# Altium PCB Whey_AGR_AGR_PCB.PcbDoc
Units mm, origin at the board's own origin, x right, y up, seen from the top; angles counter-clockwise.
Board outline 70.25 x 50.25 mm, 2 copper layers (Top Layer, Bottom Layer); 69 components, 42 nets, 191 pads, 53 vias.
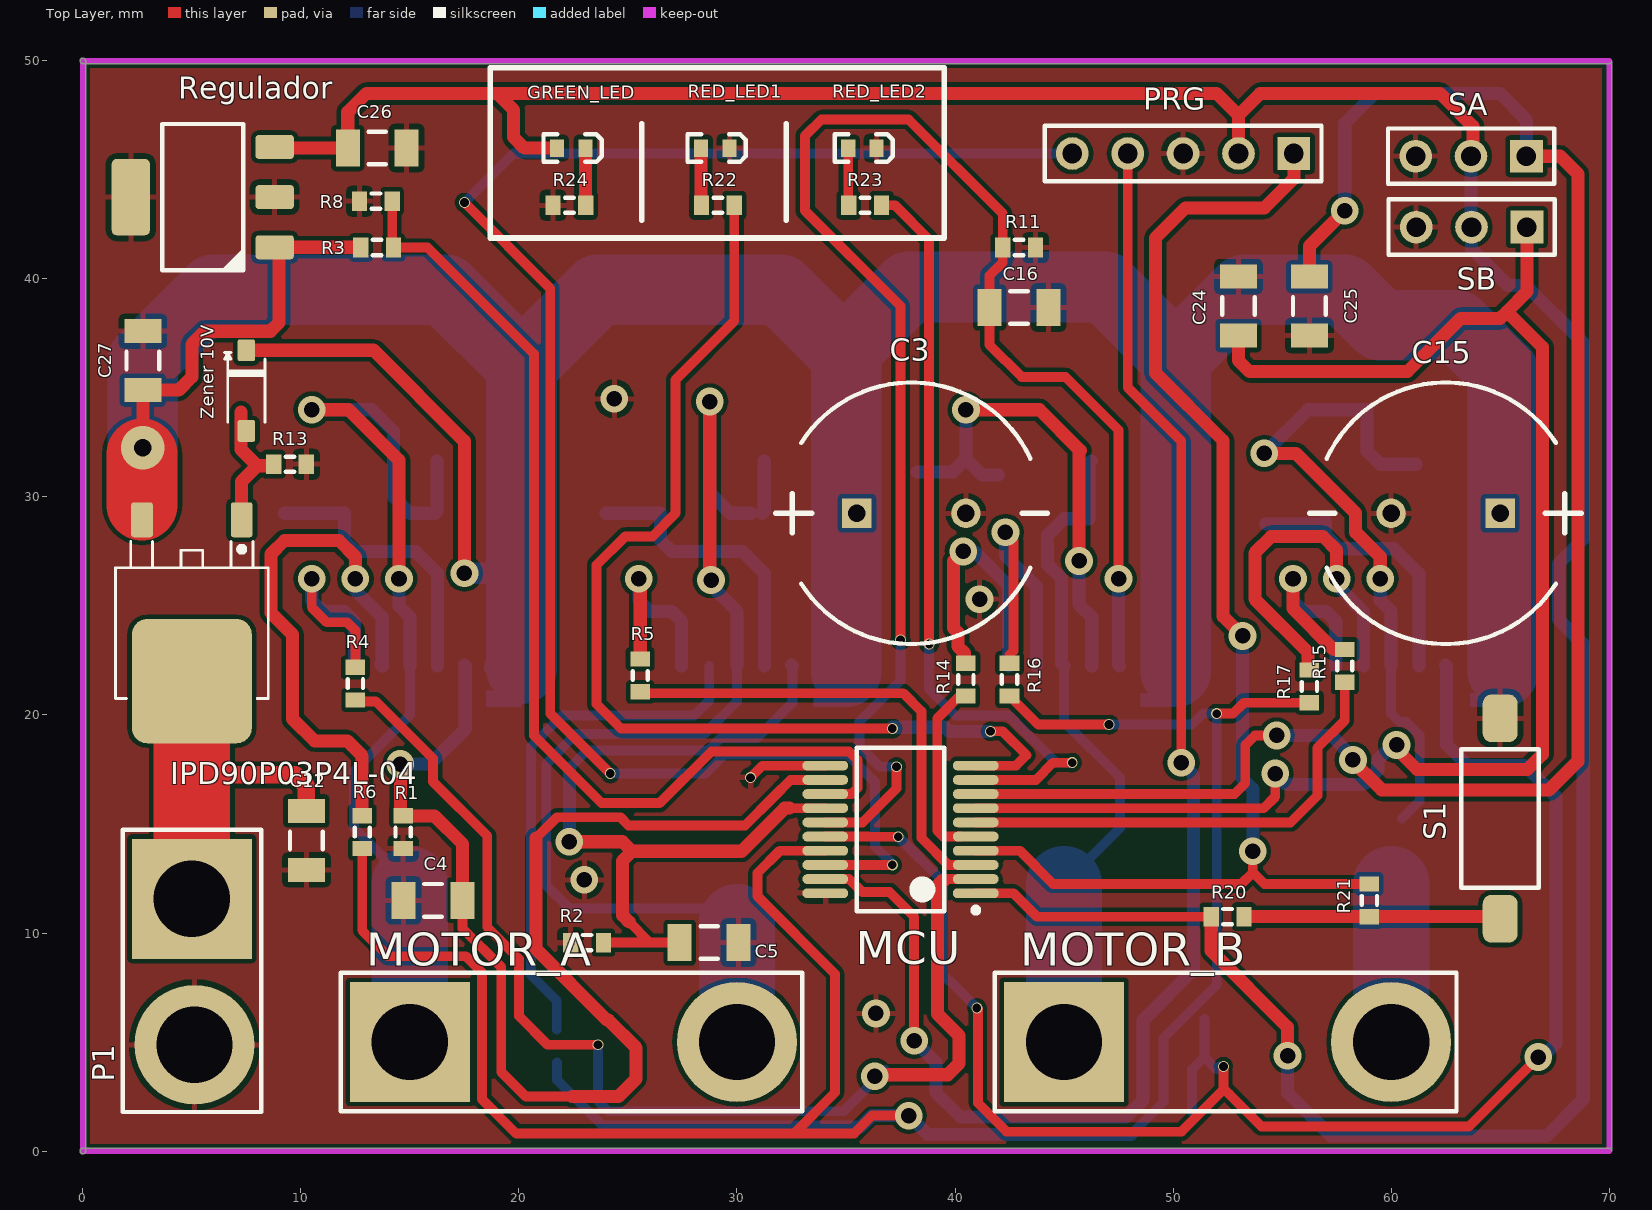
[diagram p0: Top Layer view]
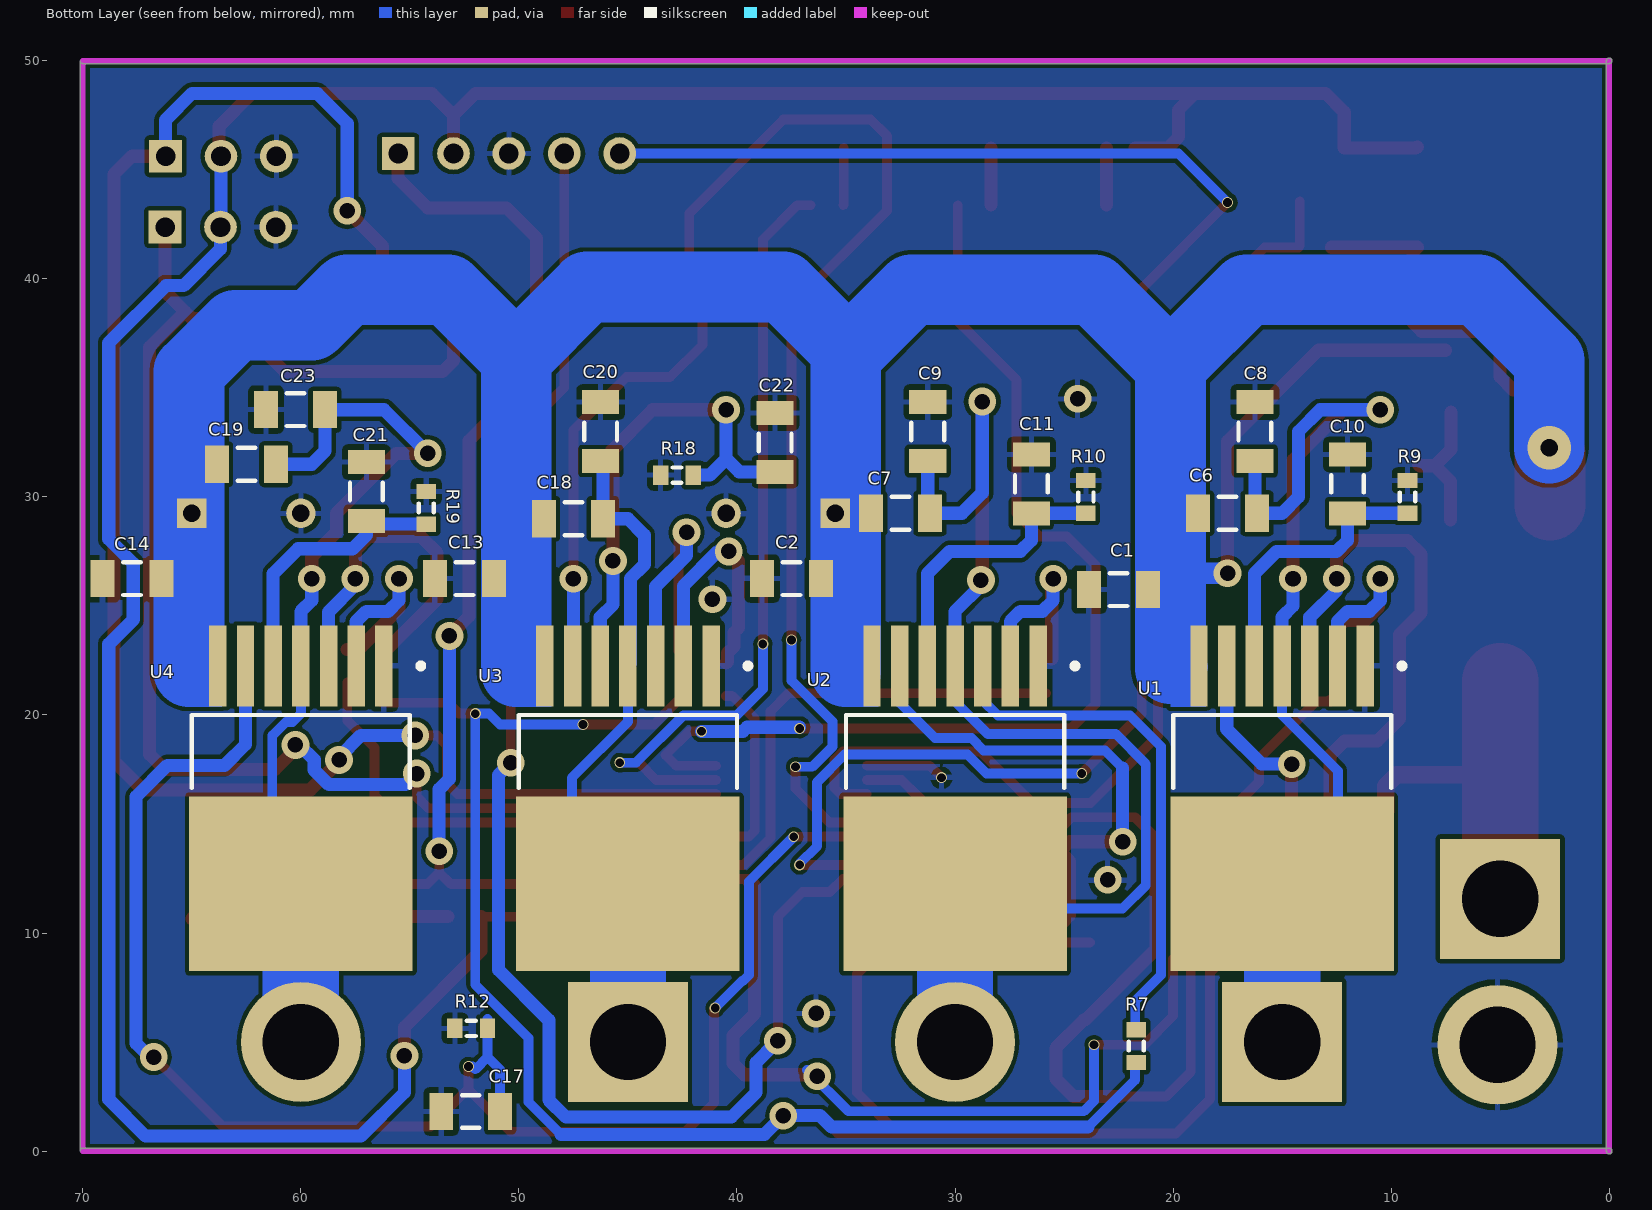
[diagram p1: Bottom Layer view, seen from below]

## Layer stack, top to bottom
Top Solder: solder mask 0.0102, Solder Resist, Dk 3.5
Top Layer: signal copper 0.0356
Dielectric 1: dielectric 0.32, FR-4, Dk 4.8
Bottom Layer: signal copper 0.0356
Bottom Solder: solder mask 0.0102, Solder Resist, Dk 3.5

## Board outline
-0.127,0 cw(c0,0) 0,0.127 70,0.127 cw(c70,0) 70.127,0 70.127,50 cw(c70,50) 70,49.873 0,49.873 cw(c0,50) -0.127,50 cw(c0,50) 0,50.127 cw(c0,50) 0.127,50 0.127,0 cw(c0,0) 0,-0.127 cw(c0,0)

## Design rules (kind name [scope] priority, off if disabled: settings)
Clearance [All] p1: gap=0.2 ignorepadtopadclearanceinfootprint=FALSE
PolygonConnect [All] p1: connectstyle=Relief reliefconductorwidth=0.254 reliefentries=4 polygonreliefangle="90 Angle" airgapwidth=0.254
RoutingVias [All] p1: holewidth=0.711 width=1.27 viastyle="Through Hole" minholewidth=0.711 minwidth=1.27 maxholewidth=0.8 maxwidth=2
SolderMaskExpansion [All] p1: expansion=0.102
Width [All] p1: maxlimit=3.5 minlimit=0.3 preferedwidth=0.6
30 further rules are at their usual default settings.

## Components (designator, comment, footprint, x,y, rotation, side; value= is the part's Value field where it differs from the comment)
C1 "Cap Semi" C1206 22.5,25.75 r180 bottom value=100nF
C2 "Cap Semi" C1206 37.5,26.25 r180 bottom value=100nF
C3 "1000uF" CAPR5-4X5 38,29.25 r0 top
C4 "Cap Semi" C1206 16.063,11.5 r0 top value=1nF
C5 "Cap Semi" C1206 28.725,9.563 r180 top value=1nF
C6 "Cap Semi" C1206 17.5,29.25 r0 bottom value=220nF
C7 "Cap Semi" C1206 32.5,29.25 r0 bottom value=220nF
C8 "Cap Semi" C1206 16.25,33 r270 bottom value=220nF
C9 "Cap Semi" C1206 31.25,33 r270 bottom value=220nF
C10 "Cap Semi" C1206 12,30.6 r270 bottom value=100nF
C11 "Cap Semi" C1206 26.5,30.6 r270 bottom value=100nF
C12 "Cap Semi" C1206 10.25,14.25 r90 top value=100nF
C13 "Cap Semi" C1206 52.5,26.25 r180 bottom value=100nF
C14 "Cap Semi" C1206 67.75,26.25 r180 bottom value=100nF
C15 "Cap2" CAPR5-4X5 62.5,29.25 r180 top value=1000uF
C16 "Cap Semi" C1206 42.938,38.687 r180 top value=1nF
C17 "Cap Semi" C1206 52.212,1.813 r180 bottom value=1nF
C18 "Cap Semi" C1206 47.5,29 r0 bottom value=220nF
C19 "Cap Semi" C1206 62.5,31.5 r0 bottom value=220nF
C20 "Cap Semi" C1206 46.25,33 r270 bottom value=220nF
C21 "Cap Semi" C1206 60.25,34 r180 bottom value=220nF
C22 "Cap Semi" C1206 38.25,32.5 r270 bottom value=100nF
C23 "Cap Semi" C1206 57,30.25 r270 bottom value=100nF
C24 "Cap Semi" C1206 53,38.75 r270 top value=100nF
C25 "Cap Semi" C1206 56.25,38.75 r270 top value=100nF
C26 "" C1206 13.5,46 r0 top value=0.1uF
C27 "Cap Semi" C1206 2.75,36.25 r270 top value=220nF
GREEN_LED "POWER_ON" 3.2X1.6X1.1 22.4,46 r0 top
IPD90P03P4L-04 "IPD50P04P4" TO-252 5,25.25 r180 top
MCU "PIC16F1829T-I/SS" MCHP-SSOP-SS20_N 37.5,14.75 r180 top
MOTOR_A "Header 2" HDR1X2#1 19.318,5 r0 top
MOTOR_B "Header 2" HDR1X2#1 49.318,5 r0 top
P1 "Header 2" HDR1X2#2 5,7.25 r270 top
PRG "Header 5" HDR1X5 55.54,45.75 r180 top
R1 "Res3" J1-0603 14.687,14.625 r90 top value=1K
R2 "Res3" J1-0603 23.125,9.563 r0 top value=1K
R3 "Res3" J1-0603 13.5,41.437 r180 top value=20K
R4 "Res3" J1-0603 12.5,21.438 r90 top value=10K
R5 "Res3" J1-0603 25.562,21.812 r90 top value=10K
R6 "Res3" J1-0603 12.812,14.625 r90 top value=10K
R7 "Res3" J1-0603 21.688,4.812 r90 bottom value=10K
R8 "Res3" J1-0603 13.437,43.563 r0 top value=5K1
R9 "Res3" J1-0603 9.25,30 r270 bottom value=510R
R10 "Res3" J1-0603 24,30 r270 bottom value=510R
R11 "Res3" J1-0603 42.938,41.437 r180 top value=1K
R12 "Res3" J1-0603 52.188,5.625 r180 bottom value=1K
R13 "Res3" J1-0603 9.5,31.5 r180 top value=10K
R14 "Res3" J1-0603 40.5,21.625 r90 top value=10K
R15 "Res3" J1-0603 57.875,22.25 r90 top value=10K
R16 "Res3" J1-0603 42.5,21.625 r90 top value=10K
R17 "Res3" J1-0603 56.25,21.312 r90 top value=10K
R18 "Res3" J1-0603 42.75,31 r180 bottom value=510R
R19 "Res3" J1-0603 54.25,29.5 r270 bottom value=510R
R20 "Res3" J1-0603 52.5,10.75 r0 top value=10K
R21 "Res3" J1-0603 59,11.5 r90 top value=10K
R22 "Res3" J1-0603 29.125,43.375 r0 top value=300R
R23 "Res3" J1-0603 35.875,43.375 r0 top value=300R
R24 "Res3" J1-0603 22.313,43.375 r0 top value=300R
RED_LED1 "CALIBRATION" 3.2X1.6X1.1 29,46 r0 top
RED_LED2 "ERROR" 3.2X1.6X1.1 35.75,46 r0 top
Regulador "LM7805" SOT223 5.5,43.75 r180 top
S1 "FSMSMTR" "TE FSMSMTR" 65,15.25 r0 top
SA "Pin head" HDR1X3 66.205,45.625 r180 top
SB "Pin head" HDR1X3 66.228,42.375 r180 top
U1 "BTN8982TA" TO127P1500X440-8N-1 15,17.25 r270 bottom
U2 "BTN8982TA" TO127P1500X440-8N-1 29.997,17.25 r270 bottom
U3 "BTN8982TA" TO127P1500X440-8N-1 45,17.25 r270 bottom
U4 "BTN8982TA" TO127P1500X440-8N-1 60,17.25 r270 bottom
"Zener 10V" "BZT52HC10WF-7" SOD123 7.5,34.875 r270 top

## Footprints (in the part's own frame and the unit in brackets; to place one, negate y for a bottom-side part, rotate by r counter-clockwise, add the part's x,y. Pads: shape width x height; smd on the part's side, far side on the other; paste and mask are expansions set on the pad)
3.2X1.6X1.1 [mm] "SMT LED; 2 Flat Leads"
  rect 0.65x0.8 smd: 1(-0.65,0) 2(0.65,0)
  silkscreen extent -1.27,-0.64 1.4,0.64, body extent -0.8,-0.39 0.8,0.39, height 0.7
C1206 [mm] "Chip Capacitor, Body 3.2x1.6mm, IPC High Density"
  rect 1.1x1.7 smd: 1(-1.35,0) 2(1.35,0)
  silkscreen extent -0.4,-0.75 0.4,0.75, body extent -1.7,-0.9 1.7,0.9, height 1.3
CAPR5-4X5 [mm] "Capacitor; 2 Leads"
  rect 1.35x1.35 hole 0.8: 1(-2.5,0)
  round 1.35 hole 0.8: 2(2.5,0)
  silkscreen extent -6.22,-6 6.22,6, body extent -6.35,-6.35 6.35,6.35, height 20.32
HDR1X2#1 [mm] "Connector; Header; 2 Position"
  rect 5.5x5.5 hole 3.5: 1(-4.318,0)
  round 5.5 hole 3.5: 2(10.682,0)
  silkscreen extent -7.49,-3.17 13.68,3.17
HDR1X2#2 [mm] "Connector; Header; 2 Position"
  rect 5.5x5.5 hole 3.5: 1(-4.318,0)
  round 5.5 hole 3.5: 2(2.375,0.125)
  silkscreen extent -7.49,-3.18 5.46,3.18
HDR1X3 [mm] "Connector; Header; 3 Position"
  rect 1.5x1.5 hole 0.9: 1(0,0)
  round 1.5 hole 0.9: 2(2.54,0) 3(5.08,0)
  silkscreen extent -1.27,-1.27 6.35,1.27, body extent -1.27,-1.27 6.35,1.27, height 9.5
HDR1X5 [mm] "Connector; Header; 5 Position"
  rect 1.5x1.5 hole 0.9: 1(0,0)
  round 1.5 hole 0.9: 2(2.54,0) 3(5.08,0) 4(7.62,0) 5(10.16,0)
  silkscreen extent -1.27,-1.27 11.43,1.27, body extent -1.27,-1.27 11.43,1.27, height 9.5
J1-0603 [mm] "Chip Resistor, Body 1.6x0.8mm, IPC High Density"
  rect 0.7x0.9 smd: 1(-0.75,0) 2(0.75,0)
  silkscreen extent -0.2,-0.35 0.2,0.35, body extent -0.85,-0.48 0.85,0.48, height 0.9
MCHP-SSOP-SS20_N [mm] "SOP, 20-Leads, Body 7.2x5.3mm, Pitch 0.65mm, IPC Medium Density"
  oval 2.1x0.45 smd: 1(-3.45,2.925) 2(-3.45,2.275) 3(-3.45,1.625) 4(-3.45,0.975) 5(-3.45,0.325) 6(-3.45,-0.325) 7(-3.45,-0.975) 8(-3.45,-1.625) 9(-3.45,-2.275) 10(-3.45,-2.925) 11(3.45,-2.925) 12(3.45,-2.275) 13(3.45,-1.625) 14(3.45,-0.975) 15(3.45,-0.325) 16(3.45,0.325) 17(3.45,0.975) 18(3.45,1.625) 19(3.45,2.275) 20(3.45,2.925)
  silkscreen extent -3.58,-3.75 2,3.82, body extent -2.8,-3.75 2.8,3.75, height 2
SOD123 [mm] "SOD-123; 2 Leads; Body 2.7 x 1.6 mm, (LxW)"
  round 0.508 on Mech15: 0(0,0)
  rrect25% 1x0.8 smd: A(1.85,0) K(-1.85,0)
  silkscreen extent -1.75,-1 1.45,0.85, body extent -1.95,-0.9 1.95,0.9, height 1.18
SOT223 [mm] "SOT223 /SC-73"
  round 1 on Mech15: 0(0,0)
  rrect25% 1.75x1.1 smd: 1(-3.3,2.3) 2(-3.3,0) 3(-3.3,-2.3)
  rrect25% 1.75x3.5 smd: 4(3.3,0)
  silkscreen extent -1.85,-3.35 1.85,3.35, body extent -3.65,-3.35 3.65,3.35, height 1.8
"TE FSMSMTR" [mm]
  rrect50% 1.6x2.19 smd: 1(0,4.595) 2(0,-4.595)
  silkscreen extent -1.78,-3.17 1.78,3.17, body extent -1.75,-4.98 1.75,4.98, height 4.42
TO127P1500X440-8N-1 [mm] "TO,1.27mm pitch;7 pin,15.00mm L X 9.25mm W X 4.40mm H body"
  rect 3.7x0.8 smd paste+0 mask+0: 1(-5,3.81) 2(-5,2.54) 3(-5,1.27) 4(-5,0) 5(-5,-1.27) 6(-5,-2.54) 7(-5,-3.81)
  rect 8x10.25 smd paste+0 mask+0: 8(5,0)
  silkscreen extent -5.12,-5 0.6,5.62, body extent -6.4,-5 8.55,5, height 4.51
TO-252 [mm] "D-PAK/TO-252-AA; 3 Leads (1 Cropped); Body 10.3 (inc. leads) x 6.7 mm (LxW max)"
  round 0.5 on Mech15: 0(0,0)
  rrect25% 1x1.6 smd: 1(-2.285,-3.7) 3(2.285,-3.7)
  rrect25% 5.5x5.7 smd: 4(0,3.7)
  silkscreen extent -3.5,-2.7 3.5,4.5, body extent -3.3,-3.95 3.3,5.76, height 2.31

## Part data
C1 C2 C4 C5 C6 C7 C8 C9 C10 C11 C12 C13 C14 C16 C17 C18 C19 C20 C21 C22 C23 C24 C25 C27: "Capacitor (Semiconductor SIM Model)", LatestRevisionDate=29-May-2009, LatestRevisionNote="IPC-7351 Footprint Added.", PackageDescription="Chip Capacitor", PackageReference=C1206, Published=8-Jun-2000, Publisher="Altium Limited"
C3: library part Cap2, "Capacitor", PackageDescription="Capacitor; 2 Leads", PackageReference=CAPR5-4X5, Published=23-Sep-2002, Publisher="Altium Limited"
C15: "Capacitor", PackageDescription="Capacitor; 2 Leads", PackageReference=CAPR5-4X5, Published=23-Sep-2002, Publisher="Altium Limited"
C26: library part "Cap Semi", "Capacitor (Semiconductor SIM Model)", LatestRevisionDate=29-May-2009, LatestRevisionNote="IPC-7351 Footprint Added.", PackageDescription="Chip Capacitor", PackageReference=C1206, Published=8-Jun-2000, Publisher="Altium Limited"
GREEN_LED RED_LED1 RED_LED2: library part LED2, "Typical RED, GREEN, YELLOW, AMBER GaAs LED", LatestRevisionDate=17-Jul-2002, LatestRevisionNote="Re-released for DXP Platform.", PackageDescription="SM LED; 2 Flat Leads", PackageReference=3.2X1.6X1.1, PackageVersion=Feb-2002, Published=8-Jun-2000, Publisher="Altium Limited"
IPD90P03P4L-04: "MOSFET P-Ch -40V -50A DPAK-2 OptiMOS-P2"
MCU: "Flash Microcontroller with XLP Technology, 32 MHz, 17 I/O, -40 to 85 degC, 20-pin SSOP (SS20), Tape and Reel", Manufacturer=Microchip, Operation Voltage Range="1.8V - 5.5V", Supplier Part Number 1=PIC16F1829T-I/SS-ND, # of A/D Channels=12, ComponentLink1Description=Datasheet, ComponentLink1URL=http://ww1.microchip.com/downloads/en/DeviceDoc/41440C.pdf, ComponentLink2Description="Package Specification", ComponentLink2URL=http://www.microchip.com/stellent/groups/techpub_sg/documents/packagingspec/en012702.pdf, ComponentLink3Description="URL Link1", ComponentLink3URL="Product URL:http://www.microchip.com/datasheet/PIC16F1829", DatasheetVersion="Rev. C", Digital Communication="1 -A/E/USART, 2 -MSSP(SPI/I2C)", EEPROM Data Memory (bytes)=256, I/O Pins=17, Internal Oscillator="32 MHz, 31 kHz", Max. CPU Speed MHz=32, Memory Type=Flash, Mounting Technology="Surface Mount", PackageDescription="20-Lead Plastic Shrink Small Outline, 5.3 x 7.2 mm Body, 0.65 mm Pitch", PackageReference=SSOP-SS20, PackageVersion="C04-072B, 12/2012", Packing=T/R, PartNumber=PIC16F1829T-I/SS, Program Memory KBytes=14, Program Memory KWords=8, RAM=1024, RoHS=TRUE, Supplier 1=Digi-Key, Supplier 2=Newark, Supplier 3=Mouser, Supplier Part Number 2=82R4387, Supplier Part Number 3=579-PIC16F1829T-I/SS, Timers="4 - 8-bit, 1 - 16-bit"
MOTOR_A MOTOR_B P1: "Header, 2-Pin", LatestRevisionDate=17-Jul-2002, LatestRevisionNote="Re-released for DXP Platform.", Publisher="Altium Limited"
PRG: "Header, 5-Pin", LatestRevisionDate=17-Jul-2002, LatestRevisionNote="Re-released for DXP Platform.", Publisher="Altium Limited"
R1 R2 R4 R5 R6 R7 R11 R12 R13 R14 R15 R16 R17 R20 R21: "Resistor", LatestRevisionDate=29-May-2009, LatestRevisionNote="IPC-7351 Footprint Added.", PackageDescription="Chip Resistor", PackageReference=J1-0603, Published=8-Jun-2000, Publisher="Altium Limited"
R3 R8 R9 R10 R18 R19 R22 R23 R24: "Resistor_SMD", LatestRevisionDate=29-May-2009, LatestRevisionNote="IPC-7351 Footprint Added.", PackageDescription="Chip Resistor", PackageReference=J1-0603, Published=8-Jun-2000, Publisher="Altium Limited"
Regulador: library part LM7805MP/NOPB, "5V Regulator, 3-Pin SOT-223, Extended Temperature, Tape and Reel", Supplier Part Number 1=MCP1824ST-1202E/DBTR-ND, ComponentLink1Description=Datasheet, ComponentLink1URL=http://ww1.microchip.com/downloads/en/DeviceDoc/22070a.pdf, ComponentLink2Description="Packaging Specification", ComponentLink2URL=http://www.microchip.com/stellent/groups/techpub_sg/documents/packagingspec/en012702.pdf, ComponentLink3Description="Microchip.com Home", ComponentLink3URL=http://www.microchip.com/, DatasheetVersion="revA, Aug-2007", PackageDescription="3-Lead Plastic Small Outline Transistor (DB) [SOT-223]", PackageReference=SOT-223-DB3, PackageVersion="revBB, Aug-2009", Published=29-Jan-2009, Publisher="Altium Limited", Supplier 1=Digi-Key, Supplier 2=Digi-Key, Supplier 3=Digi-Key, Supplier 4=Farnell, Supplier Part Number 2=MCP1824ST-1202E/DBCT-ND, Supplier Part Number 3=MCP1824ST-1202E/DBDKR-ND, Supplier Part Number 4=1675417
S1: "SWITCH TACTILE SPST-NO 0.05A 24V", Contact Rating @ Voltage="0.05A @ 24VDC", Illumination Type, Colour=-, Manufacturer="TE Connectivity Alcoswitch Switches", Operating Force=180gf, Operating Temperature="-35C ~ 85C", Supplier Part Number 1=450-1758-2-ND, Actuator Orientation="Top Actuated", Actuator Type=Standard, Circuit=SPST-NO, ComponentLink1Description=Datasheet, ComponentLink1URL=http://www.te.com/commerce/DocumentDelivery/DDEController?Action=srchrtrv&DocNm=1437566-3&DocType=Customer+Drawing&DocLang=English, ComponentLink2Description="Digi-Key Listing", ComponentLink2URL=http://www.digikey.com/product-detail/en/FSMSMTR/450-1758-2-ND/529671, Illumination=Non-Illuminated, Illumination Voltage=-, Mechanical Life="20,000 Cycles", PartId=8251, Part Number=FSMSMTR, Price=0.175, Supplier 1=Digi-Key, Switch Function=Off-Mom, Switch Travel=0.25mm
SA SB: library part "Header 3", "Header, 3-Pin", LatestRevisionDate=17-Jul-2002, LatestRevisionNote="Re-released for DXP Platform.", Publisher="Altium Limited"
U1 U2 U3 U4: "High Current PN Half Bridge NovalithIC", Manufacturer="Infineon Technologies", ManufacturerPartNumber=BTN8982TA, PackageReference=PG-TO263-7-1
"Zener 10V": "Diode Zener 10.6V 375 mW AEC-Q101"

## Via types
v1: diameter 1.27, hole 0.711, Top Layer to Bottom Layer, 36 vias
v2: diameter 0.5, hole 0.4, Top Layer to Bottom Layer, 16 vias
v3: diameter 2, hole 0.8, Top Layer to Bottom Layer, 1 vias

## Nets (pads, with @x,y where several pads share a name; then routed paths per layer and width w, separated by ;. In a path a pad name is that pad's centre, name@x,y a point inside that pad or via, vN(x,y) a via of type N, cw(c..) or ccw(c..) an arc to the next point about the centre after c; other vN are vias at no path point)
5V: C26.1 GREEN_LED.1 MCU.1 PRG.2 R20.1 Regulador.3 SA.2 SB.2 | length 148.7
  Top Layer w0.45: MCU.1 42.675,11.825 43.75,10.75 R20.1
  Top Layer w0.6: Regulador.3 8.85,46 C26.1 12.15,47.65 13,48.5 19,48.5 ; GREEN_LED.1 20.25,46 19.75,46.5 19.75,47.75 19,48.5 ; R20.1 51.75,9.188 55.25,5.687 v1(55.25,4.375) ; PRG.2 53,47.5 ; SA.2 63.75,45.71 63.75,47 62.25,48.5 54,48.5 53,47.5 ; 19,48.5 52,48.5 53,47.5
  Bottom Layer w0.6: v1(55.25,4.375) 55.25,2.687 57.25,0.687 67.125,0.687 68.812,2.375 68.812,23.25 67.687,24.375 67.687,26.945 68.812,28.07 68.812,37.063 66.188,39.688 65.375,39.688 63.688,41.375 SB.2 63.665,42.397 SA.2
CHANEL_A: C25.1 MCU.8 SA.1 | length 80.6
  Top Layer w0.45: MCU.8 52.813,16.375 53.312,16.875 53.312,18.625 53.75,19.062 v1(54.75,19.062)
  Top Layer w0.6: C25.1 56.25,41.5 v1(57.875,43.125) ; v1(58.249,17.937) 58.249,18.25 58.062,18.063 59.562,16.562 67.25,16.562 68.562,17.875 68.562,44.813 67.75,45.625 SA.1
  Bottom Layer w0.6: v1(54.75,19.062) 57.25,19.062 58.249,18.063 v1(58.249,17.937) ; v1(57.875,43.125) 57.875,47.125 59.25,48.5 65,48.5 66.205,47.295 SA.1
CHANEL_B: C24.2 MCU.7 SB.1 | length 69.7
  Top Layer w0.45: MCU.7 54.163,15.725 54.688,16.25 v1(54.688,17.313)
  Top Layer w0.6: C24.2 53,36.25 53.5,35.75 60.75,35.75 63.187,38.188 65,38.188 65.313,38.5 ; v1(60.25,18.625) 60.063,18.625 61.188,17.5 66.25,17.5 66.938,18.187 66.938,36.875 65.313,38.5 ; SB.1 66.228,39.415 65.313,38.5
  Bottom Layer w0.6: v1(54.688,17.313) 55.198,16.802 58.719,16.802 59.385,17.468 59.385,17.948 60.062,18.625 v1(60.25,18.625)
GND: C1.1 C2.1 C3.2 C4.1 C5.1 C8.1 C9.1 C10.1 C11.1 C12.1 C13.1 C14.1 C15.2 C16.1 C17.1 C20.1 C21.1 C22.1 C23.1 C24.1 C25.2 C26.2 C27.1 MCU.11 MCU.20 P1.2 PRG.3 R1.1 R2.1 R8.1 R9.1 R10.1 R11.1 R12.1 R13.1 R18.1 R19.1 R24.1 RED_LED1.2 RED_LED2.2 Regulador.2 Regulador.4 S1.1 SA.3 SB.3 U1.1 U2.1 U3.1 U4.1 | length 3.7
  Top Layer w0.45: v2(30.625,17.125) 31.175,17.675 MCU.11
  other v1: 36.375,6.312 23,12.438 41.125,25.312 24.375,34.5
INH: MCU.17 R6.1 R7.1 R16.1 R17.1 | length 118.2
  Top Layer w0.45: R6.1@12.812,13.75 12.812,10.125 14,8.938 17.562,8.938 18.313,8.187 18.313,2.375 19.875,0.813 32.625,0.813 ; MCU.17 31.963,13.775 30.937,12.75 30.937,11.688 34.5,8.125 34.5,2.688 32.625,0.813 ; v1(37.875,1.625) 36.187,1.625 35.375,0.813 32.625,0.813 ; R16.1 43.813,19.562 v2(47.062,19.562) ; v2(52,20.062) 52.75,20.062 53.25,20.563 R17.1
  Bottom Layer w0.45: R7.1@21.75,4.062 21.75,3.25 23.9,1.1 ; v2(47.062,19.562) 50.875,19.562 51.375,20.062 v2(52,20.062) 52,7.625 49.562,5.187 49.562,2.25 48.075,0.763
  Bottom Layer w0.6: 23.9,1.1 35.663,1.1 36.187,1.625 v1(37.875,1.625) 38.737,0.763 48.075,0.763
IS_1A: C4.2 MCU.12 R1.2 U1.6 | length 58.1
  Top Layer w0.45: C4.2@17.413,11.063 17.413,10.213 19.188,8.438 19.188,3.625 20.313,2.5 22.438,2.5 ; 20.788,14.35 21.748,15.31 24.653,15.31 25.025,14.938 30.374,14.938 31.685,16.248 32.462,17.025 MCU.12
  Top Layer w0.6: v1(14.563,17.75) 14.563,15.5 R1.2 16.125,15.375 17.413,14.088 C4.2 C4.2@17.413,11.063 ; 20.788,14.35 20.788,9.255 24.033,6.01 24.095,6.01 25.375,4.73 25.375,3.313 24.562,2.5 22.438,2.5
  Bottom Layer w0.6: v1(14.563,17.75) 15.937,17.75 17.54,19.352 U1.6 U1.6@17.5,22.29
IS_1B: C5.2 MCU.14 R2.2 U2.6 | length 37.7
  Top Layer w0.45: R2.2@23.813,9.563 C5.2 ; 25.063,10.5 25.969,9.594 ; 32.413,15.725 MCU.14
  Top Layer w0.6: v1(22.312,14.187) 24.75,14.187 25.188,13.75 ; 25.063,10.5 24.75,10.813 24.75,13.312 25.188,13.75 ; 32.413,15.725 32.187,15.725 30.212,13.75 25.188,13.75
  Bottom Layer w0.45: 22.312,17.562 23.125,18.375 28.688,18.375 29.25,18.938 30.915,18.938 32.54,20.563 U2.6@32.54,22.25
  Bottom Layer w0.6: v1(22.312,14.187) 22.312,17.562 ; U2.6@32.5,22.29 U2.6@32.54,22.25
IS_2A: C16.2 MCU.15 R11.2 U3.6 | length 73.4
  Top Layer w0.45: MCU.15 35.763,15.075 37.313,16.625 v2(37.313,17.625) ; v2(37.5,23.437) 37.5,38.75 33.125,43.125 33.125,46.563 33.875,47.313 37.875,47.313 42.188,43 R11.2 42.188,40.75 41.588,40.15 C16.2 41.588,36.975 43.063,35.5 45.063,35.5 47.5,33.063 v1(47.5,26.25)
  Bottom Layer w0.45: v2(37.313,17.625) 36.544,17.625 35.625,18.544 35.625,19.698 37.5,21.572 v2(37.5,23.437)
  Bottom Layer w0.6: v1(47.5,26.25) 47.5,22.29 U3.6
IS_2B: C17.2 MCU.16 R12.2 U4.6 | length 74.9
  Top Layer w0.45: MCU.16 36.012,14.425 36.022,14.415 v2(37.397,14.415) ; v2(41,6.562) 41.047,6.515 41.047,2.203 42.36,0.89 50.39,0.89 52.344,2.844 ; v2(52.312,3.875) 52.312,2.875 52.344,2.844 ; v1(66.75,4.313) 63.562,1.125 54.063,1.125 52.562,2.625 52.344,2.844
  Bottom Layer w0.45: v2(37.397,14.415) 39.45,12.363 39.45,8.074 39.699,7.825 39.737,7.825 v2(41,6.562) ; C17.2 50.862,3.737 51.437,4.312 ; R12.2@51.437,6.063 R12.2 51.437,4.312 ; v2(52.312,3.875) 52.125,3.875 52,3.75 51.437,4.312
  Bottom Layer w0.6: U4.6@62.5,22.29 U4.6 62.54,18.648 63.5,17.688 66.125,17.688 67.562,16.25 67.562,4.937 66.938,4.313 v1(66.75,4.313)
LED_CALIBRATION: MCU.10 R22.2 | length 49.5
  Top Layer w0.45: R22.2 29.875,38.063 27.187,35.375 27.187,29.25 26.125,28.188 24.875,28.188 23.563,26.875 23.563,20.5 24.687,19.375 v2(37.125,19.375) ; MCU.10 42.8,17.675 43.281,18.156 42.188,19.25 v2(41.625,19.25)
  Bottom Layer w0.6: v2@37.125,19.437 39.537,19.437 39.725,19.25 v2(41.625,19.25)
LED_ERROR: MCU.9 R23.2 | length 36.2
  Top Layer w0.45: R23.2 37.25,43.375 38.813,41.812 v2(38.813,23.25) ; MCU.9 43.713,17.025 44.5,17.812 v2(45.375,17.812)
  Bottom Layer w0.45: v2(38.813,23.25) 38.813,21.187 40.025,19.975 42.462,19.975 44.625,17.812 v2(45.375,17.812)
MCLR: MCU.4 PRG.1 R21.2 | length 58.7
  Top Layer w0.45: MCU.4 42.975,13.775 44.5,12.25 53.125,12.25 53.656,12.781 ; v1(53.656,13.75) 53.656,12.781 ; R21.2 54.187,12.25 53.656,12.781
  Top Layer w0.6: v1(53.188,23.625) 52.287,24.525 52.287,32.588 49.187,35.688 49.187,41.875 50.562,43.25 54.188,43.25 55.54,44.602 PRG.1
  Bottom Layer w0.6: v1(53.188,23.625) 53.188,17.063 53.656,16.594 v1(53.656,13.75)
MOTOR_A+: C6.1 C8.2 MOTOR_A.1 U1.4 U1.8 | length 46.5
  Top Layer w0.6: v1(10.5,34) 12.187,34 14.5,31.688 v1(14.5,26.25)
  Bottom Layer w0.45: U1.8 12.438,14.813 12.438,17.438 15,20 U1.4
  Bottom Layer w0.6: v1(10.5,34) 13.25,34 14.25,33 14.25,30 15,29.25 C6.1 16.25,29.35 C8.2 ; v1(14.5,26.25) 14.5,25 15,24.5 U1.4
  Bottom Layer w3.5: MOTOR_A.1@15,4.25 MOTOR_A.1 U1.8
MOTOR_A-: C7.1 C9.2 MOTOR_A.2 U2.4 U2.8 | length 54.4
  Top Layer w0.6: v1(28.75,34.375) 28.75,26.25 v1(28.813,26.187)
  Bottom Layer w0.45: U2.8@30,10.5 29.375,11.125 22.313,11.125 21.252,12.185 21.252,17.752 22.625,19.125 28.5,19.125 30,20.625 U2.4@30,22.25
  Bottom Layer w0.6: v1(28.75,34.375) 28.75,30.187 29.687,29.25 C7.1@30.65,29.25 ; v1(28.813,26.187) 28.813,26.062 28.75,26 30,24.75 U2.4@30,22.25 ; C7.1 31.25,29.35 C9.2
  Bottom Layer w3.5: MOTOR_A.2@30,4.25 MOTOR_A.2 U2.8@30,10.5
MOTOR_B+: C18.1 C20.2 MOTOR_B.1 U3.4 U3.8 | length 31.3
  Bottom Layer w0.45: U3.8 47.563,14.813 47.563,17.125 45,19.687 U3.4
  Bottom Layer w0.6: U3.4 44.888,22.363 44.888,26.257 44.25,26.895 44.25,28.25 45,29 C18.1 46.15,31.55 C20.2
  Bottom Layer w3.5: MOTOR_B.1@45,4.25 MOTOR_B.1 U3.8
MOTOR_B-: C19.1 C21.2 MOTOR_B.2 U4.4 U4.8 | length 38.7
  Top Layer w0.6: v1(54.187,32) 55.625,32 58.375,29.25 58.375,28.375 59.5,27.25 v1(59.5,26.25)
  Bottom Layer w0.45: U4.4 60,20.062 60.377,19.685 60.689,19.685 61.31,19.064 61.31,16.06 U4.8@60.5,15.25
  Bottom Layer w0.6: v1(54.187,32) 56.188,34 C21.2 ; C21.2@58.9,33.75 58.9,32.1 59.5,31.5 C19.1 ; v1(59.5,26.25) 59.5,25.25 60,24.75 U4.4
  Bottom Layer w3.5: MOTOR_B.2@60,4.25 MOTOR_B.2 U4.8
NetC10_2: C10.2 R9.2 U1.5 | length 13.1
  Bottom Layer w0.6: R9.2 C10.2 12,28 12.5,27.5 15.25,27.5 16.27,26.48 U1.5
NetC11_2: C11.2 R10.2 U2.5 | length 13.4
  Bottom Layer w0.6: R10.2 C11.2 26.5,28 27,27.5 30.25,27.5 31.27,26.48 U2.5@31.27,22.25
NetC22_2: C22.2 R18.2 U3.5 | length 22.7
  Top Layer w0.6: v1(40.5,34) 43.875,34 45.75,32.125 45.688,32.063 v1(45.688,27.063)
  Bottom Layer w0.6: C22.2 39.9,31.15 40.5,31.75 ; v1(40.5,34) 40.5,31.75 ; R18.2 41.25,31 40.5,31.75 ; v1(45.688,27.063) 45.688,25.063 46.27,24.48 U3.5
NetC23_2: C23.2 R19.2 U4.5 | length 12.7
  Bottom Layer w0.6: R19.2 56.85,28.75 C23.2 57,28.25 57.625,27.625 60.125,27.625 61.27,26.48 U4.5
NetGREEN_LED_2: GREEN_LED.2 R24.2 | length 2.6
  Top Layer w0.45: R24.2@23.05,43.388 R24.2
  Top Layer w0.6: R24.2@23.05,43.388 GREEN_LED.2
NetIPD90P03P4L-04_G: "Zener 10V.A" IPD90P03P4L-04.1 R13.2 | length 6.3
  Top Layer w0.6: 7.25,33.9 7.25,32.18 8,31.43 ; IPD90P03P4L-04.1 7.285,30.715 8,31.43 ; R13.2 8.68,31.43 8,31.43
NetMCU_13: MCU.13 R3.1 R8.2 | length 48.3
  Top Layer w0.45: R8.2 14.188,41.5 R3.1 15.813,41.437 20.687,36.562 20.687,19.063 23.79,15.96 26.46,15.96 28.825,18.325 35.144,18.325 35.525,17.944 35.525,16.65 35.25,16.375 MCU.13
NetR4_2: R4.2 U1.2 | length 10.8
  Top Layer w0.45: v1(10.5,26.25) 10.5,24.937 11.187,24.25 12.125,24.25 12.5,23.875 R4.2
  Bottom Layer w0.6: v1(10.5,26.25) 10.5,25.25 11,24.75 12,24.75 12.46,24.29 U1.2
NetR5_2: R5.2 U2.2 | length 9.1
  Top Layer w0.6: v1(25.5,26.25) 25.562,26.188 R5.2
  Bottom Layer w0.6: v1(25.5,26.25) 25.5,25.25 26,24.75 27,24.75 27.46,24.29 U2.2@27.46,22.25
NetR6_2: R6.2 U1.3 | length 24.7
  Top Layer w0.6: v1(12.5,26.25) 12.5,27.25 11.75,28 9.25,28 8.625,27.375 8.625,24.687 9.625,23.687 9.625,19.813 10.625,18.812 12.125,18.812 12.812,18.125 R6.2
  Bottom Layer w0.6: v1(12.5,26.25) 12.5,25.71 13.73,24.48 U1.3 U1.3@13.646,22.334
NetR7_2: R7.2 U2.3 | length 24.1
  Bottom Layer w0.45: R7.2@21.738,5.563 21.738,6.886 20.55,8.074 20.55,18.55 21.975,19.975 28.036,19.975 28.73,20.669 U2.3@28.73,22.25
NetR14_2: R14.2 U3.2 | length 11.9
  Top Layer w0.6: v1(40.375,27.5) 39.937,27.063 39.937,23.979 40.135,23.782 40.135,23.135 40.438,22.832 40.438,22.437 R14.2
  Bottom Layer w0.6: v1(40.375,27.5) 40.875,27.5 42.46,25.915 U3.2
NetR15_2: R15.2 U4.2 | length 9.9
  Top Layer w0.6: v1(55.5,26.25) 55.5,24.875 57.375,23 R15.2
  Bottom Layer w0.6: v1(55.5,26.25) 55.5,25.25 56,24.75 57,24.75 57.46,24.29 U4.2
NetR16_2: R16.2 U3.3 | length 12.6
  Top Layer w0.45: v1(42.313,28.375) 42.687,28 42.687,22.938 42.5,22.75
  Bottom Layer w0.6: v1(42.313,28.375) 42.313,27.312 43.73,25.895 U3.3
NetR17_2: R17.2 U4.3 | length 16.6
  Top Layer w0.45: R17.2@56.188,22.125 R17.2
  Top Layer w0.6: R17.2@56.188,22.125 56.188,22.875 53.75,25.313 53.75,27.437 54.5,28.188 56.875,28.188 57.5,27.563 v1(57.5,26.25)
  Bottom Layer w0.6: v1(57.5,26.25) 57.5,25.96 58.73,24.73 U4.3
NetR20_2: R20.2 R21.1 S1.2 | length 11.8
  Top Layer w0.6: R20.2 R21.1 64.905,10.75 S1.2
NetR22_1: R22.1 RED_LED1.1 | length 2.6
  Top Layer w0.45: R22.1@28.35,43.4 R22.1
  Top Layer w0.6: R22.1@28.35,43.4 RED_LED1.1
NetR23_1: R23.1 RED_LED2.1 | length 2.6
  Top Layer w0.45: RED_LED2.1 35.1,43.4 R23.1
PGC: MCU.18 PRG.5 | length 78
  Top Layer w0.45: v2(17.5,43.5) 21.438,39.562 21.438,20.062 v2(24.188,17.313) ; MCU.18 v2(37.125,13.125)
  Bottom Layer w0.45: v2(17.5,43.5) 19.75,45.75 PRG.5 ; v2(24.188,17.313) 28.563,17.313 29.435,18.185 35.065,18.185 36.337,16.913 36.337,13.976 37.125,13.188 v2(37.125,13.125)
PGD: MCU.19 PRG.4 | length 69
  Top Layer w0.45: MCU.19 35.144,12.475 35.744,11.875 37,11.875 38.125,10.75 v1(38.125,5.062) ; PRG.4 47.92,35.017 50.375,32.563 v1(50.375,17.812)
  Bottom Layer w0.6: v1@38.25,4.938 39.125,4.063 39.125,2.688 40.25,1.562 47.85,1.562 48.625,2.338 48.625,6 50.938,8.313 50.938,17.25 v1(50.375,17.812)
PWM_1A: MCU.2 R4.1 | length 53.7
  Top Layer w0.45: R4.1 12.812,20.688 12.75,20.625 13.438,20.625 16.063,18 16.063,16.937 18.55,14.45 18.55,10.263 20,8.812 20,6.187 21.313,4.875 v2(23.625,4.875) ; 39.489,12.475 MCU.2
  Top Layer w0.6: v1(36.313,3.437) 36.375,3.5 38.625,3.5 39.668,3.5 40.187,4.02 40.187,5.293 39.188,6.292 39.188,12.174 39.414,12.4 39.489,12.4
  Bottom Layer w0.45: v2(23.625,4.875) 23.625,2.295 24.094,1.825 34.888,1.825 v1@36.782,3.718
PWM_1B: MCU.3 R5.1 | length 21.8
  Top Layer w0.45: R5.1@25.812,21 37.625,21 38.457,20.168 38.457,14.355 39.688,13.125 MCU.3
PWM_2A: MCU.5 R14.1 | length 8.1
  Top Layer w0.45: MCU.5@40.25,14.425 39.45,14.425 39.188,14.687 39.188,19.85 40.212,20.875 R14.1
PWM_2B: MCU.6 R15.1 | length 21.9
  Top Layer w0.45: MCU.6 55.387,15.075 56.625,16.312 56.625,18.5 57.875,19.75 R15.1
VCC: "Zener 10V.K" C1.2 C2.2 C3.1 C6.2 C7.2 C13.2 C14.2 C15.1 C18.2 C19.2 C27.2 IPD90P03P4L-04.3 R3.2 Regulador.1 U1.7 U2.7 U3.7 U4.7 | length 176.6
  Top Layer w0.45: R3.2@12.737,41.45 R3.2
  Top Layer w0.6: v3@2.715,31.965 2.715,32.215 v3(2.75,32.25) 2.75,34.5 C27.2@3,34.75 ; C27.2 4.4,34.9 5,35.5 5,37 5.6,37.6 8.6,37.6 9,38 9,41.25 Regulador.1 R3.2@12.737,41.45 ; 7.5,36.725 13.338,36.725 17.5,32.563 v1(17.5,26.5)
  Top Layer w3.25: IPD90P03P4L-04.3@2.715,29.625 v3@2.715,31.965
  Bottom Layer w0.6: 19.125,26.5 19.875,25.75
  Bottom Layer w1: v1(17.5,26.5) 19.125,26.5 ; U1.7@18.89,22.205 19.06,22.375 19.393,22.759 ; 19.875,25.5 19.875,25.75
  Bottom Layer w3.25: v3(2.75,32.25) 2.75,36.25 6,39.5 16.625,39.5 20.125,36 ; 20.125,22.125 20.125,36 ; 35.014,21.986 35.014,36.486 34.875,36.625 ; 50.125,22 50.125,36.375 ; 65.125,22 65.125,35.75 63,37.875 59.5,37.875 57.875,39.5 53.25,39.5 50.125,36.375 ; 20.125,36 23.625,39.5 32,39.5 34.875,36.625 ; 34.875,36.625 37.875,39.625 46.875,39.625 50.125,36.375
VIN: C12.2 IPD90P03P4L-04.4 P1.1 | length 16.6
  Top Layer w0.8: 5,17.25 9.75,17.25 10.25,16.75 C12.2
  Top Layer w3.5: P1.1 5,17.25 IPD90P03P4L-04.4
pads on no net: "Zener 10V.0" IPD90P03P4L-04.0 Regulador.0

## Polygon pours and split planes (outlines as drawn)
GND on Mechanical 1 "Malha GND" (solid, remove dead copper): 0,50 0,0 70,0 70,50
GND on Top Layer "GND_L01_P006" (solid, remove dead copper, pour order 6): 0,0 0,50 70,50 70,0
GND on Bottom Layer "GND_L02_P008" (solid, remove dead copper, pour order 8): 0,0 0,50 70,50 70,0

## Keep-outs
Keep-Out Layer:
  lines w0.254: 0,0 0,50 70,50 70,0 0,0

## Other copper
Bottom Layer:
  rectangle net VCC: 63.625,20.375 65.125,21
  rectangle net VCC: 48.5,20.375 50,21
  rectangle net VCC: 33.5,20.375 35.125,21.125
  rectangle net VCC: 18.5,20.375 20.125,21.125

## Silkscreen, mask and mechanical layers (free items; w line width, h text height)
Top Overlay:
  lines w0.254: 18.687,49.625 18.687,41.875 ; 18.687,49.688 39.5,49.688 39.5,41.875 18.688,41.875 ; 25.625,42.688 25.625,47.125 ; 32.25,42.688 32.25,47.125 ; 18.687,41.875 18.688,41.875